# Altium PCB btalti.PcbDoc
Units mm, origin at the board's own origin, x right, y up, seen from the top; angles counter-clockwise.
Board outline 50 x 25 mm, 2 copper layers (Top Layer, Bottom Layer); 72 components, 77 nets, 329 pads, 0 vias.
Unrouted connection lines stored in the file: 196.
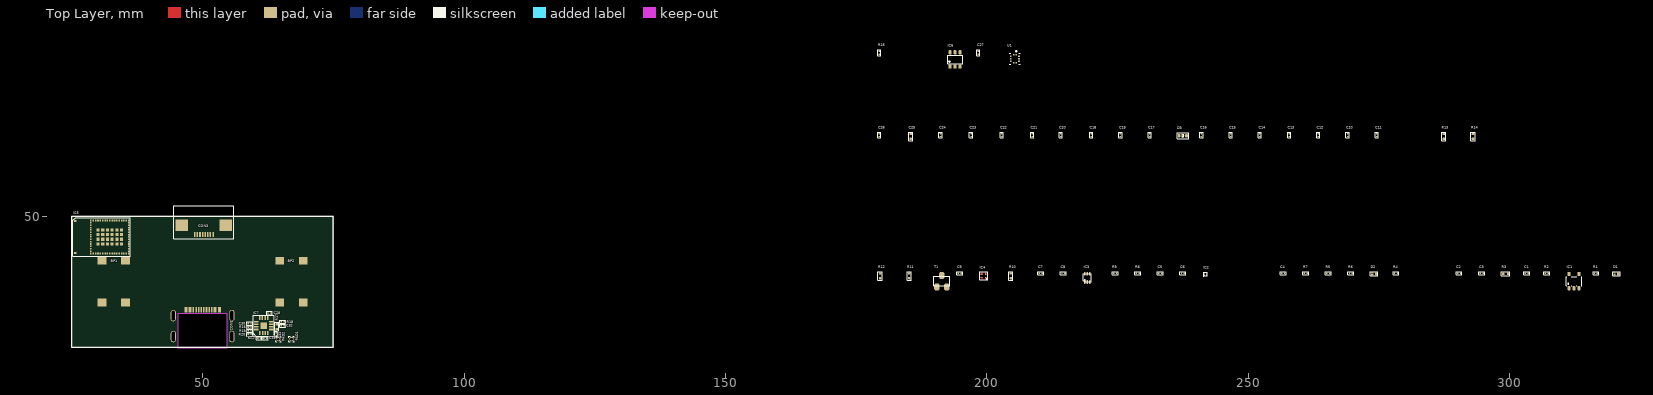
[diagram p0: Top Layer view]
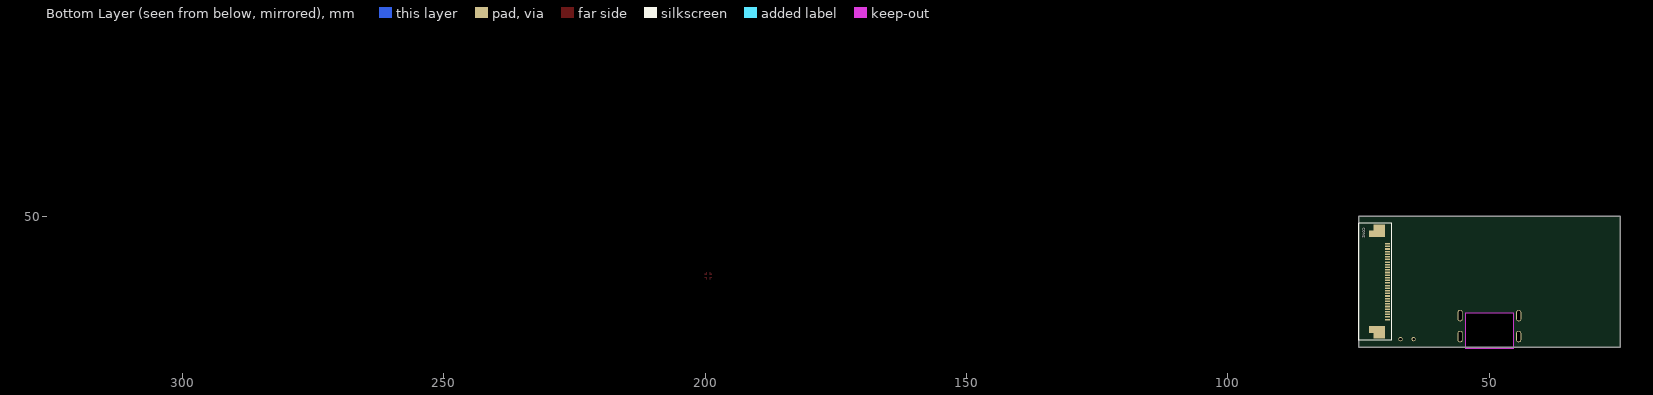
[diagram p1: Bottom Layer view, seen from below]

## Layer stack, top to bottom
Top Solder: solder mask 0.0102, Solder Resist, Dk 3.5
Top Layer: signal copper 0.0356
Dielectric 1: dielectric 0.32, FR-4, Dk 4.8
Bottom Layer: signal copper 0.0356
Bottom Solder: solder mask 0.0102, Solder Resist, Dk 3.5

## Board outline
25,25 25,50 75,50 75,25
cut-out: 45.35,31.5 54.65,31.5 54.65,24.8 45.35,24.8

## Design rules (kind name [scope] priority, off if disabled: settings)
Clearance [All] p1: gap=0.254 ignorepadtopadclearanceinfootprint=FALSE
DiffPairsRouting [All] p1: maxlimit=0.254 minlimit=0.254 mostfreqgap=0.254 toplayer_minwidth=0.381 toplayer_maxwidth=0.381 toplayer_prefwidth=0.381 bottomlayer_minwidth=0.381 bottomlayer_maxwidth=0.381 bottomlayer_prefwidth=0.381 maxuncoupledlength=12.7
PolygonConnect [All] p1: connectstyle=Relief reliefconductorwidth=0.254 reliefentries=4 polygonreliefangle="90 Angle" airgapwidth=0.254
RoutingVias [All] p1: holewidth=0.711 width=1.27 viastyle="Through Hole" minholewidth=0.711 minwidth=1.27 maxholewidth=0.711 maxwidth=1.27
SolderMaskExpansion [All] p1: expansion=0.102 istentingtop=FALSE
Width [All] p1: maxlimit=0.254 minlimit=0.254 preferedwidth=0.254
29 further rules are at their usual default settings.

## Classes and differential pairs
component class beep: C28 C29 C30 C31 C32 C33 IC7 PAD1 PAD2 R16 R17 R18 R19 R20
component class Micro: C27 CON3 IC5 IC6 R15 U1
component class epaper: C10 C11 C12 C13 C14 C15 C16 C17 C18 C19 C20 C21 C22 C23 C24 C25 C26 CON2 D3 R13 R14
component class Alim: BP1 BP2 C1 C2 C3 C4 C5 C6 C7 C8 C9 CON1 D1 D2 IC1 IC2 IC3 IC4 R1 R2 R3 R4 R5 R6 R7 R8 R9 R10 R11 R12 T1
differential pair D: +D_P -D_N

## Components (designator, comment, footprint, x,y, rotation, side; value= is the part's Value field where it differs from the comment)
BP1 "B3FS-1012P" B3FS 33,37.5 r90 top
BP2 "B3FS-1012P" B3FS 67,37.5 r90 top
C1 "1uF (0201) AEC-Q200" C0201 303.276,39.116 r0 top value=1uF
C2 "1uF (0201) AEC-Q200" C0201 290.322,39.116 r0 top value=1uF
C3 "1uF (0201) AEC-Q200" C0201 294.64,39.116 r0 top value=1uF
C4 "1uF (0201) AEC-Q200" C0201 256.667,39.116 r0 top value=1uF
C5 "1uF (0201) AEC-Q200" C0201 233.172,39.116 r0 top value=1uF
C6 "1uF (0201) AEC-Q200" C0201 237.49,39.116 r0 top value=1uF
C7 "1uF (0201) AEC-Q200" C0201 210.312,39.116 r0 top value=1uF
C8 "1uF (0201) AEC-Q200" C0201 214.63,39.116 r0 top value=1uF
C9 "100nF (0201) AEC-Q200" C0201 194.818,39.116 r0 top value=100nF
C10 "100nF (0201) AEC-Q200" C0201 268.986,65.532 r90 top value=100nF
C11 "4.7uF (0201)" C0201 274.574,65.532 r90 top value=4.7uF
C12 "100nF (0201) AEC-Q200" C0201 263.398,65.532 r90 top value=100nF
C13 "1uF (0201) AEC-Q200" C0201 257.81,65.532 r90 top value=1uF
C14 "1uF (0201) AEC-Q200" C0201 252.222,65.532 r90 top value=1uF
C15 "1uF (0201) AEC-Q200" C0201 246.634,65.532 r90 top value=1uF
C16 "1uF (0201) AEC-Q200" C0201 241.046,65.532 r90 top value=1uF
C17 "1uF (0201) AEC-Q200" C0201 231.14,65.532 r90 top value=1uF
C18 "1uF (0201) AEC-Q200" C0201 219.964,65.532 r90 top value=1uF
C19 "1uF (0201) AEC-Q200" C0201 225.552,65.532 r90 top value=1uF
C20 "1uF (0201) AEC-Q200" C0201 214.122,65.532 r90 top value=1uF
C21 "1uF (0201) AEC-Q200" C0201 208.661,65.532 r90 top value=1uF
C22 "1uF (0201) AEC-Q200" C0201 202.819,65.532 r90 top value=1uF
C23 "1uF (0201) AEC-Q200" C0201 196.977,65.532 r90 top value=1uF
C24 "1uF (0201) AEC-Q200" C0201 191.135,65.532 r90 top value=1uF
C25 "2.2uF (0402)" C0402 185.42,65.278 r90 top value=2.2uF
C26 "1uF (0201) AEC-Q200" C0201 179.451,65.532 r90 top value=1uF
C27 "100nF (0201) AEC-Q200" C0201 198.374,81.28 r90 top value=100nF
C28 "1uF (0201) AEC-Q200" C0201 62.8,31.5 r180 top value=1uF
C29 "1uF (0201) AEC-Q200" C0201 60.8,26.7 r0 top value=1uF
C30 "1uF (0201) AEC-Q200" C0201 59,29.5 r0 top value=1uF
C31 "1uF (0201) AEC-Q200" C0201 62,26.7 r180 top value=1uF
C32 "1uF (0201) AEC-Q200" C0201 65.325,29.1 r180 top value=1uF
C33 "1uF (0201) AEC-Q200" C0201 64.1,27.425 r90 top value=1uF
CON1 "USB4520-03-1-A" USB4520-03-1-A 50,27 r180 top
CON2 "52437-3071" 52437-3071 69.5,37.5 r270 bottom
CON3 "54548-0871" 54548-0871 50.25,46.5 r180 top
D1 "BAV170MYL" DFN1006-3 320.421,38.989 r0 top
D2 "BAV170MYL" DFN1006-3 274.066,38.989 r0 top
D3 "1PS79SB40 AEC-Q101" "SOD-523 (0603)" 237.49,65.405 r0 top value=Schottky
IC1 "MCP73831" SOT23-5 312.293,37.592 r0 top
IC2 "TPS7A0333PYCHR" BGA4C35P2X2 241.808,38.989 r90 top
IC3 "TLV70018DSER" "WSON6 (1.5x1.5)" 219.202,38.227 r90 top value=TLV70018
IC4 "MIC94040YFL-TR" FDFN4 199.39,38.608 r90 top
IC5 "STM32WB5MMG" SiP-LGA86 30.77,46.05 r90 top
IC6 "USBLC6-2" SOT23-6 193.929,80.01 r0 top value=USBLC6-2SC6
IC7 "MAX97220E" TQFN-16 61.7,29.1 r0 top
PAD1 "hole_0.8/0.5" "0.8 / 0.5" 67,26.5 r90 top
PAD2 "hole_0.8/0.5" "0.8 / 0.5" 64.5,26.5 r90 top
R1 "1k (0201)" R0201 316.484,39.116 r0 top value=1k
R2 "10k (0201) 0.1%" R0201 307.086,39.116 r0 top value="10k 0.1%"
R3 "1M (0402)" R0402 299.212,38.989 r0 top value=1M
R4 "47k5 (0201)" R0201 278.257,39.116 r0 top value=47k
R5 "1k (0201)" R0201 265.303,39.116 r0 top value=1k
R6 "1k (0201)" R0201 269.621,39.116 r0 top value=1k
R7 "10k (0201) 0.1%" R0201 260.985,39.116 r0 top value="10k 0.1%"
R8 "5k1 (0201)" R0201 228.854,39.116 r0 top value=5k1
R9 "5k1 (0201)" R0201 224.536,39.116 r0 top value=5k1
R10 "1M (0402)" R0402 204.597,38.608 r90 top value=1M
R11 "100k (0402)" R0402 185.166,38.608 r90 top value=100k
R12 "100k (0402)" R0402 179.578,38.608 r90 top value=100k
R13 "NM (0402)" "R0402 (NM)" 287.401,65.278 r90 top value=NM
R14 "NM (0402)" "R0402 (NM)" 292.989,65.278 r90 top value=NM
R15 "10k (0201) 0.1%" R0201 179.451,81.28 r90 top value="10k 0.1%"
R16 "10k (0201) 0.1%" R0201 59,28.8 r180 top value="10k 0.1%"
R17 "NM (0402)" "R0402 (NM)" 64.2,28.9 r90 top value=NM
R18 "10k (0201) 0.1%" R0201 65.325,29.8 r0 top value="10k 0.1%"
R19 "10k (0201) 0.1%" R0201 59,28.1 r0 top value="10k 0.1%"
R20 "10k (0201) 0.1%" R0201 59,27.4 r0 top value="10k 0.1%"
T1 "BS170F" SOT-23-3 191.389,37.592 r0 top
U1 "BMP581" Bosch_Sensortec_0_MFG 205.359,80.137 r0 top

## Footprints (in the part's own frame and the unit in brackets; to place one, negate y for a bottom-side part, rotate by r counter-clockwise, add the part's x,y. Pads: shape width x height; smd on the part's side, far side on the other; paste and mask are expansions set on the pad)
"0.8 / 0.5" [mm]
  round 0.8 hole 0.5: 1(0,0)
  silkscreen extent -0.53,-0.53 0.53,0.53
52437-3071 [mm]
  rect 0.3x0.9 smd: 1(-7.25,0) 2(-6.75,0) 3(-6.25,0) 4(-5.75,0) 5(-5.25,0) 6(-4.75,0) 7(-4.25,0) 8(-3.75,0) 9(-3.25,0) 10(-2.75,0) 11(-2.25,0) 12(-1.75,0) 13(-1.25,0) 14(-0.75,0) 15(-0.25,0) 16(0.25,0) 17(0.75,0) 18(1.25,0) 19(1.75,0) 20(2.25,0) 21(2.75,0) 22(3.25,0) 23(3.75,0) 24(4.25,0) 25(4.75,0) 26(5.25,0) 27(5.75,0) 28(6.25,0) 29(6.75,0) 30(7.25,0)
  rect 2.4x2.2 smd: M1(-9.7,-1.55) M2(9.7,-1.55)
  rect 1.3x0.85 smd: M1(-9.15,-3.075) M2(9.15,-3.075)
  silkscreen extent -11.2,-5.5 11.25,0.8, body extent -10.8,-5 10.8,0.2, height 2.12
54548-0871 [mm]
  rect 0.3x0.9 smd: 1(-1.75,0) 2(-1.25,0) 3(-0.75,0) 4(-0.25,0) 5(0.25,0) 6(0.75,0) 7(1.25,0) 8(1.75,0)
  rect 2.4x2.2 smd: M1(-4.2,-1.8) M2(4.2,-1.8)
  silkscreen extent -5.7,-5.5 5.75,0.8, body extent -4.6,-4.8 4.6,0.2, height 1.18
B3FS [mm]
  rect 1.5x1.7 smd paste-10: 1(4,-2.25) 2(-4,-2.25) 3(4,2.25) 4(-4,2.25)
  body extent -4,-3.15 4,3.15, height 4.3
BGA4C35P2X2 [mm]
  round 0.204 smd: A1(-0.175,0.175) A2(0.175,0.175) B1(-0.175,-0.175) B2(0.175,-0.175)
  silkscreen extent -0.45,-0.35 0.35,0.45, body extent -0.4,-0.4 0.4,0.4, height 0.4
Bosch_Sensortec_0_MFG [mm]
  rect 0.3x0.325 smd paste+0 mask+0: 1(0.25,0.75) 2(-0.25,0.75) 6(-0.25,-0.75) 7(0.25,-0.75)
  rect 0.325x0.3 smd paste+0 mask+0: 3(-0.775,0.5) 4(-0.775,0) 5(-0.775,-0.5) 8(0.775,-0.5) 9(0.775,0) 10(0.775,0.5)
  silkscreen extent -1.05,-1.05 1.05,1.57, body extent -1.55,-1.55 1.55,1.55, height 0.25
C0201 [mm]
  rrect50% 0.25x0.3 smd: 1(-0.275,0) 2(0.275,0)
  silkscreen extent -0.55,-0.3 0.55,0.3, body extent -0.3,-0.15 0.3,0.15, height 0.29
C0402 [mm]
  rrect50% 0.4x0.5 smd: 1(-0.45,0) 2(0.45,0)
  silkscreen extent -0.8,-0.4 0.8,0.4, body extent -0.5,-0.25 0.5,0.25, height 0.48
DFN1006-3 [mm] "SOT883"
  rect 0.4x0.25 smd: 1(-0.35,-0.175) 2(-0.35,0.175)
  rect 0.4x0.6 smd: 3(0.35,0)
  silkscreen extent -0.7,-0.4 0.7,0.4, body extent -0.5,-0.3 0.5,0.3, height 0.48
FDFN4 [mm]
  rect 0.23x0.23 smd paste+0: 1(-0.325,-0.325) 2(0.325,-0.325) 3(0.325,0.325) 4(-0.325,0.325)
  Top Layer region: 0.21,0.21 0.7,0.21 0.7,0.44 0.21,0.44
  Top Layer region: -0.21,0.21 -0.21,0.44 -0.7,0.44 -0.7,0.21
  Top Layer region: -0.21,-0.21 -0.7,-0.21 -0.7,-0.44 -0.21,-0.44
  Top Layer region: 0.21,-0.21 0.21,-0.44 0.7,-0.44 0.7,-0.21
  Top Layer region: -0.21,-0.21 -0.44,-0.21 -0.44,-0.7 -0.21,-0.7
  Top Layer region: 0.21,-0.21 0.21,-0.7 0.44,-0.7 0.44,-0.21
  Top Layer region: 0.21,0.21 0.44,0.21 0.44,0.7 0.21,0.7
  Top Layer region: -0.21,0.21 -0.21,0.7 -0.44,0.7 -0.44,0.21
  silkscreen extent -0.75,-0.75 0.75,0.75, body extent -0.6,-0.6 0.6,0.6, height 0.8
R0201 [mm]
  rrect50% 0.25x0.3 smd: 1(-0.275,0) 2(0.275,0)
  silkscreen extent -0.55,-0.3 0.55,0.3, body extent -0.3,-0.15 0.3,0.15, height 0.15
R0402 [mm]
  rrect50% 0.4x0.5 smd: 1(-0.45,0) 2(0.45,0)
  silkscreen extent -0.8,-0.4 0.8,0.4, body extent -0.5,-0.25 0.5,0.25, height 0.3
"R0402 (NM)" [mm]
  rrect50% 0.4x0.5 smd paste-1: 1(-0.45,0) 2(0.45,0)
  silkscreen extent -0.8,-0.4 0.8,0.4
SiP-LGA86 [mm]
  rect 0.35x0.35 smd: 1(-3.175,2.145) 17(-3.175,-5.105) 31(3.175,-5.105) 47(3.175,2.145)
  rect 0.35x0.3 smd: 2(-3.175,1.67) 3(-3.175,1.22) 4(-3.175,0.77) 5(-3.175,0.32) 6(-3.175,-0.13) 7(-3.175,-0.58) 8(-3.175,-1.03) 9(-3.175,-1.48) 10(-3.175,-1.93) 11(-3.175,-2.38) 12(-3.175,-2.83) 13(-3.175,-3.28) 14(-3.175,-3.73) 15(-3.175,-4.18) 16(-3.175,-4.63) 32(3.175,-4.63) 33(3.175,-4.18) 34(3.175,-3.73) 35(3.175,-3.28) 36(3.175,-2.83) 37(3.175,-2.38) 38(3.175,-1.93) 39(3.175,-1.48) 40(3.175,-1.03) 41(3.175,-0.58) 42(3.175,-0.13) 43(3.175,0.32) 44(3.175,0.77) 45(3.175,1.22) 46(3.175,1.67)
  rect 0.3x0.35 smd: 18(-2.7,-5.105) 19(-2.25,-5.105) 20(-1.8,-5.105) 21(-1.35,-5.105) 22(-0.9,-5.105) 23(-0.45,-5.105) 24(0,-5.105) 25(0.45,-5.105) 26(0.9,-5.105) 27(1.35,-5.105) 28(1.8,-5.105) 29(2.25,-5.105) 30(2.7,-5.105) 48(2.7,2.145) 49(2.25,2.145) 50(1.8,2.145) 51(1.35,2.145) 52(0.9,2.145) 53(0.45,2.145) 54(0,2.145) 55(-0.45,2.145) 56(-0.9,2.145) 57(-1.35,2.145) 58(-1.8,2.145) 59(-2.25,2.145) 60(-2.7,2.145)
  rect 0.6x0.6 smd: 61(-1.35,0.77) 62(-1.35,-0.13) 63(-1.35,-1.03) 64(-1.35,-1.93) 65(-1.35,-2.83) 66(-1.35,-3.73) 67(-0.45,-3.73) 68(0.45,-3.73) 69(1.35,-3.73) 70(1.35,-2.83) 71(1.35,-1.93) 72(1.35,-1.03) 73(1.35,-0.13) 74(1.35,0.77) 75(0.45,0.77) 76(-0.45,0.77) 77(-0.45,-0.13) 78(-0.45,-1.03) 79(-0.45,-1.93) 80(-0.45,-2.83) 81(0.45,-2.83) 82(0.45,-1.93) 83(0.45,-1.03) 84(0.45,-0.13)
  rect 0.43x0.43 smd: 85(-3.05,5.105) 86(3.05,5.105)
  silkscreen extent -3.65,-5.43 3.65,5.57, body extent -3.65,-5.43 3.65,5.57, height 1.35
"SOD-523 (0603)" [mm]
  rrect50% 0.5x0.6 smd: A(-0.7,0) K(0.7,0)
  silkscreen extent -1.1,-0.6 1.1,0.6, body extent -0.82,-0.4 0.83,0.4, height 0.65
SOT23-5 [mm] "(5)"
  rrect50% 0.6x0.8 smd: 1(-0.95,-1.35) 2(0,-1.35) 3(0.95,-1.35) 4(0.95,1.35) 5(-0.95,1.35)
  silkscreen extent -1.45,-0.9 1.45,0.8, body extent -1.45,-1.4 1.45,1.4, height 1.45
SOT23-6 [mm]
  rrect50% 0.6x0.8 smd: 1(-0.95,-1.35) 2(0,-1.35) 3(0.95,-1.35) 4(0.95,1.35) 5(0,1.35) 6(-0.95,1.35)
  silkscreen extent -1.45,-0.8 1.45,0.8, body extent -1.45,-1.4 1.45,1.4, height 1.45
SOT-23-3 [mm]
  rrect75% 1x1.4 smd paste+0: 1(-0.95,-1.1) 2(0.95,-1.1) 3(0,1.1)
  silkscreen extent -1.5,-0.9 1.5,0.9, body extent -1.5,-1.5 1.5,1.5, height 1.3
TQFN-16 [mm]
  rect 0.3x0.8 smd: 1(-0.73,-1.405) 2(-0.23,-1.405) 3(0.27,-1.405) 4(0.77,-1.405) 9(0.75,1.425) 10(0.25,1.425) 11(-0.25,1.425) 12(-0.75,1.425)
  rect 0.8x0.3 smd: 5(1.425,-0.75) 6(1.425,-0.25) 7(1.425,0.25) 8(1.425,0.75) 13(-1.425,0.75) 14(-1.425,0.25) 15(-1.425,-0.25) 16(-1.425,-0.75)
  rect 1.23x1.23 smd: EXP(0,0)
  silkscreen extent -2,-2 2,2, body extent -1.5,-1.5 1.5,1.5, height 0.75
USB4520-03-1-A [mm]
  rect 0.3x1.1 smd paste+0: A1(3.35,-5.15) A4(2.55,-5.15) A5(1.25,-5.15) A6(0.25,-5.15) A7(-0.25,-5.15) A8(-1.25,-5.15) A9(-2.55,-5.15) A12(-3.35,-5.15) B1(-3.05,-5.15) B4(-2.25,-5.15) B5(-1.75,-5.15) B6(-0.75,-5.15) B7(0.75,-5.15) B8(1.75,-5.15) B9(2.25,-5.15) B12(3.05,-5.15)
  rrect100% 1x2.2 hole 0.6 slot 1.8 at 90 deg paste-2539.97: M1(-5.6,0) M2(-5.6,-4) M3(5.6,0) M4(5.6,-4)
  body extent -5.77,-5.1 5.77,2.1, height 1.36
"WSON6 (1.5x1.5)" [mm]
  rrect50% 0.8x0.25 smd: 1(-0.75,0.5)
  rrect50% 0.7x0.25 smd: 2(-0.8,0) 3(-0.8,-0.5) 4(0.8,-0.5) 5(0.8,0) 6(0.8,0.5)
  silkscreen extent -0.75,-0.75 0.75,0.75, body extent -0.77,-0.75 0.77,0.75, height 0.75

## Part data
C1 C2 C3 C4 C5 C6 C7 C8 C13 C14 C15 C16 C17 C18 C19 C20 C21 C22 C23 C24 C26 C28 C29 C30 C31 C32 C33: "X7T 20% 0201 6.3V AEC-Q200", Fabricant=Murata, Référence=GRT033D70J105ME13D
C9 C10 C12 C27: "X7S 0201 10% 16V AEC-Q200", Fabricant=MURATA, Référence=GRT033C71C104KE01D
C11: "X7T 0201 20% 4V", Fabricant="TAIYO YUDEN", Référence=MSASA063EB5475MFNA01
C25: "X6S 0402 10% 25V", Fabricant="Murata Electronics", Référence=GRM155C81E225KE11D
CON1: "Connecteur USB-C Receptacke mid PCB", Fabricant=GCT, Référence=USB4520-03-1-A
CON2 CON3: "Connecteur FFC/FPC, Right-Angle, Surface Mount, ZIF, Bottom Contact / Style, 30 Circuits", Fabricant=MOLEX
  CON2: Référence=52437-3071
  CON3: Référence=54548-0871
D1 D2: "Diodes - General Purpose, Power, Switching BAV170M/SOT883/XQFN3", Fabricant=Nexperia, Référence=BAV170MYL
D3: "Diode Schottky SOD-523 AEC-Q101", Fabricant=Nexperia, Référence=1PS79SB40,115
IC1: "Chargeur Li-Ion/Li-Polymer", Référence=MCP73831T-2ACI/OT
IC2: "LDO 3V3 200-mA  4-DSBGA -40 to 125", Mouser Part Number=595-TPS7A0333PYCHR, Datasheet Link=https://www.ti.com/lit/ds/symlink/tps7a02.pdf?ts=1649920047900&ref_url=https%253A%252F%252Fwww.mouser.fr%252F, Fabricant="Texas Instruments", Geometry.Height=0.4mm, Référence=TPS7A0333PYCHR
IC3: "1V8 6-WSON", Fabricant="Texas Instrument", Référence=TLV70018DSER
IC4: "Power Load Distribution Switch IC, Active High, 1 Output, 5.5 V in, 3 A, 0.028 ohm, MLF-4", Fabricant=Microchip, Référence=MIC94040YFL-TR
IC7: "Differential Input DirectDrive / Line Drivers/Headphone Amplifiers", Fabriquant="Maxim Integrated", Référence=MAX97220E
R1 R5 R6: "1% 0201 0.063W 100ppm", Fabricant=VISHAY, Référence=CRCW02011K00FKED
R2 R7 R15 R16 R18 R19 R20: "0.1% 0201 0.05W 50ppm", Fabricant=YAGEO, Référence=RE0201BRE0710KL
R3 R10: "1% 0402 0.063W 100ppm", Fabricant=MULTICOMP, Référence=MCWR04X1004FTL
R4 R8 R9: "1% 0201 0.05W 100ppm", Fabricant=VISHAY
  R4: Référence=CRCW020147K0FKED
  R8 R9: Référence=CRCW02015K10FKED
R11 R12: "1% 0402  0.063W 100ppm", Fabricant=MULTICOMP, Référence=MCWR04X1003FTL
T1: "N-MOS", Fabricant="Diodes Inc.", RefSupplier=9526005, Référence=BS170F, Supplier=Farnell
U1: "Absolute Pressure Sensor 1.65 to 3.6 V SPI -WFLGA-10", Fabriquant="BMP581 by Bosch Sensortec", Référence=BMP581
BP1 BP2: Fabricant=Omron, Référence=B3FS-1012P
IC5: Fabricant=ST, Référence=STM32WB5MMG
IC6: Fabricant=ST, Référence=USBLC6-2SC6

## Nets (pads, with @x,y where several pads share a name; then routed paths per layer and width w, separated by ;. In a path a pad name is that pad's centre, name@x,y a point inside that pad or via, vN(x,y) a via of type N, cw(c..) or ccw(c..) an arc to the next point about the centre after c; other vN are vias at no path point)
1.8V: C8.1 IC3.3 U1.10
3.3_EN: D1.3 D2.3 IC2.B1 R3.2
3V: C6.1 C10.1 C11.1 CON2.3 CON3.2 IC2.A2 IC5.4 IC5.6 IC5.15 IC5.32 R13.2 R15.2 U1.1
BARO_INT: D1.2 IC5.38 U1.7
BARO_SPI_MISO: IC5.20 U1.5
BARO_SPI_MOSI: IC5.19 U1.4
BARO_SPI_NSS: IC5.27 U1.6
BARO_SPI_SCK: IC5.2 U1.2
BAT_MON: IC5.12 R11.1 R12.2
BAT_MON_EN: C9.1 IC5.42
BEEP_SHDN: IC5.82 IC7.16
BEEP_SIGNAL: C32.1 IC5.66
BT_DN: C4.1 D2.1 IC5.23 R5.2 R7.2
BT_UP: C1.1 D1.1 IC5.22 R1.2 R2.2
D_N: CON1.A7 CON1.B7 IC6.3
D_P: CON1.A6 CON1.B6 IC6.1
EPD_BS: CON2.10 IC5.37
EPD_BUSY: CON2.9 IC5.41
EPD_NRST: CON2.8 IC5.9
EPD_SPI_MISO: CON2.7 IC5.70
EPD_SPI_MOSI: CON2.4 IC5.3
EPD_SPI_NSS: CON2.6 IC5.11
EPD_SPI_SCK: CON2.5 IC5.34
EPD_VPP: CON2.1 R13.1 R14.1
GND: C1.2 C2.2 C3.2 C4.2 C5.2 C6.2 C7.2 C8.2 C10.2 C11.2 C12.2 C13.1 C14.1 C15.1 C16.1 C18.1 C24.1 C25.2 C26.1 C27.1 C28.1 C29.1 C30.1 C33.1 CON1.A1 CON1.A12 CON1.B1 CON1.B12 CON1.M1 CON1.M2 CON1.M3 CON1.M4 CON2.2 CON2.M1 CON2.M2 CON3.1 CON3.M1 CON3.M2 D3.K IC1.2 IC2.B2 IC3.2 IC4.2 IC5.5 IC5.16 IC5.17 IC5.31 IC5.57 IC5.60 IC5.84 IC5.86 IC6.2 IC7.3 IC7.6 IC7.7 IC7.14 IC7.EXP R2.1 R3.1 R4.1 R7.1 R8.2 R9.2 R12.1 R14.2 U1.3 U1.8 U1.9
LATCH_1_8: IC4.4 IC5.45
LATCH_3_3: IC5.46 R6.2
NetBP1_2: BP1.2 R1.1
NetBP2_2: BP2.2 R5.1
NetC9_2: C9.2 R10.2 T1.1
NetC12_1: C12.1 C13.2 CON2.11
NetC14_2: C14.2 CON2.12
NetC15_2: C15.2 CON2.13
NetC16_2: C16.2 CON2.14
NetC17_1: C17.1 CON2.17
NetC17_2: C17.2 CON2.16
NetC18_2: C18.2 CON2.15 D3.A
NetC19_1: C19.1 CON2.19
NetC19_2: C19.2 CON2.18
NetC20_1: C20.1 CON2.21
NetC20_2: C20.2 CON2.20
NetC21_1: C21.1 CON2.23
NetC21_2: C21.2 CON2.22
NetC22_1: C22.1 CON2.25
NetC22_2: C22.2 CON2.24
NetC23_1: C23.1 CON2.27
NetC23_2: C23.2 CON2.26
NetC24_2: C24.2 CON2.28
NetC25_1: C25.1 CON2.29
NetC26_2: C26.2 CON2.30
NetC30_2: C30.2 IC7.11 R17.2
NetC31_1: C31.1 IC7.4
NetC31_2: C31.2 IC7.2
NetC32_2: C32.2 R18.2
NetC33_2: C33.2 IC7.5 R17.1
NetCON1_A5: CON1.A5 R8.1
NetCON1_B5: CON1.B5 R9.1
NetD2_2: D2.2 R6.1
NetIC1_5: IC1.5 R4.2
NetIC3_6: IC3.6 IC4.1
NetIC5_13: IC5.13 R15.1
NetIC5_30: IC5.30 IC6.6
NetIC7_8: IC7.8 R18.1 R20.2
NetIC7_15: IC7.15 R16.1 R19.2
NetR11_2: R11.2 T1.2
PIEZZO_A: IC7.12 PAD1.1 R16.2
PIEZZO_B: IC7.10 PAD2.1 R19.1 R20.1
STAT_NCP: IC1.1 IC5.8
SWD_CLK: CON3.3 IC5.26
SWD_DIO: CON3.4 IC5.25
SWD_SWO: CON3.5 IC5.21
UART_RX: CON3.7 IC5.18
UART_TX: CON3.8 IC5.39
UC_NRST: C27.2 CON3.6 IC5.10
USBD_N: IC5.29 IC6.4
VBAT: BP1.3 BP2.3 C3.1 C5.1 C7.1 C28.2 C29.2 IC1.3 IC2.A1 IC3.1 IC4.3 IC7.1 IC7.9 IC7.13 R10.1 T1.3
VUSB: C2.1 CON1.A4 CON1.A9 CON1.B4 CON1.B9 IC1.4 IC6.5
pads on no net: BP1.1 BP1.4 BP2.1 BP2.4 CON1.A8 CON1.B8 IC3.4 IC3.5 IC5.1 IC5.7 IC5.14 IC5.24 IC5.28 IC5.33 IC5.35 IC5.36 IC5.40 IC5.43 IC5.44 IC5.47 IC5.48 IC5.49 IC5.50 IC5.51 IC5.52 IC5.53 IC5.54 IC5.55 IC5.56 IC5.58 IC5.59 IC5.61 IC5.62 IC5.63 IC5.64 IC5.65 IC5.67 IC5.68 IC5.69 IC5.71 IC5.72 IC5.73 IC5.74 IC5.75 IC5.76 IC5.77 IC5.78 IC5.79 IC5.80 IC5.81 IC5.83 IC5.85

## Silkscreen, mask and mechanical layers (free items; w line width, h text height)
Top Overlay:
  the board outline again, w0.1